# Altium PCB Encoder.PcbDoc
Units mil, origin at the board's own origin, x right, y up, seen from the top; angles counter-clockwise.
Board outline 1125.98 x 1665.21 mil, 2 copper layers (Top Layer, Bottom Layer); 8 components, 10 nets, 36 pads, 0 vias.
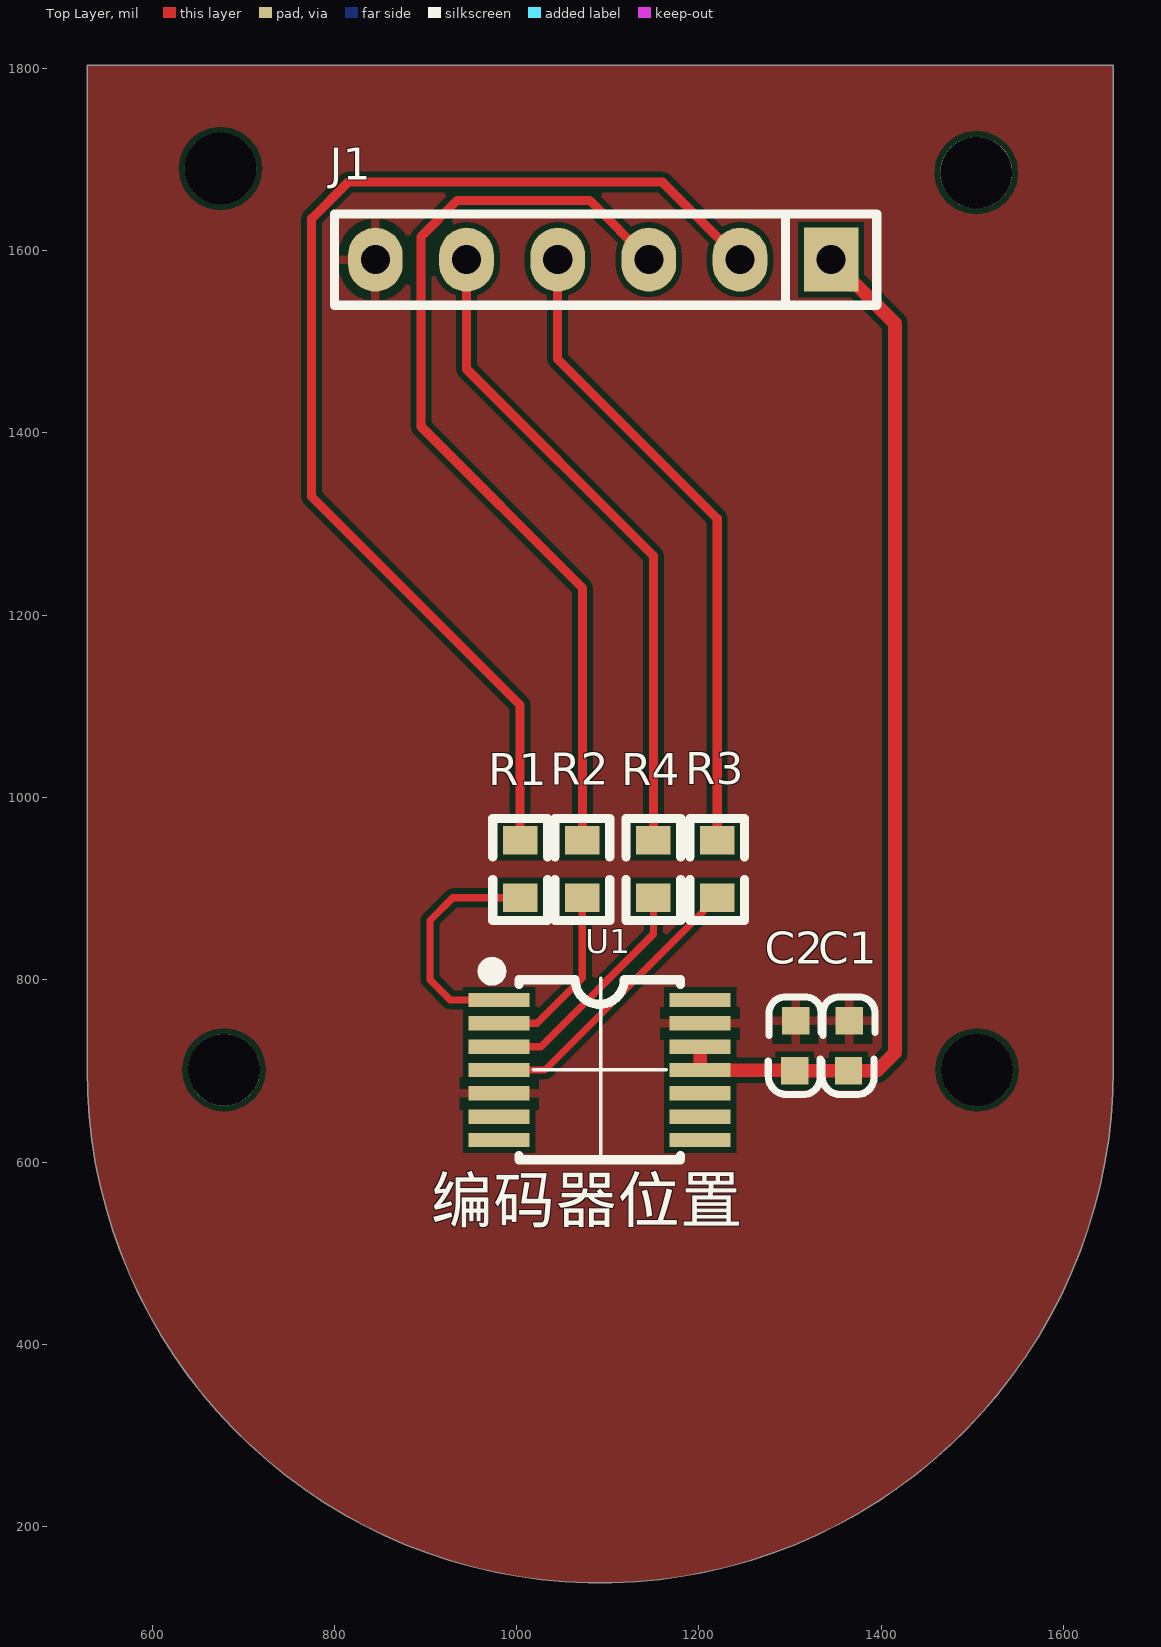
[diagram p0: Top Layer view]
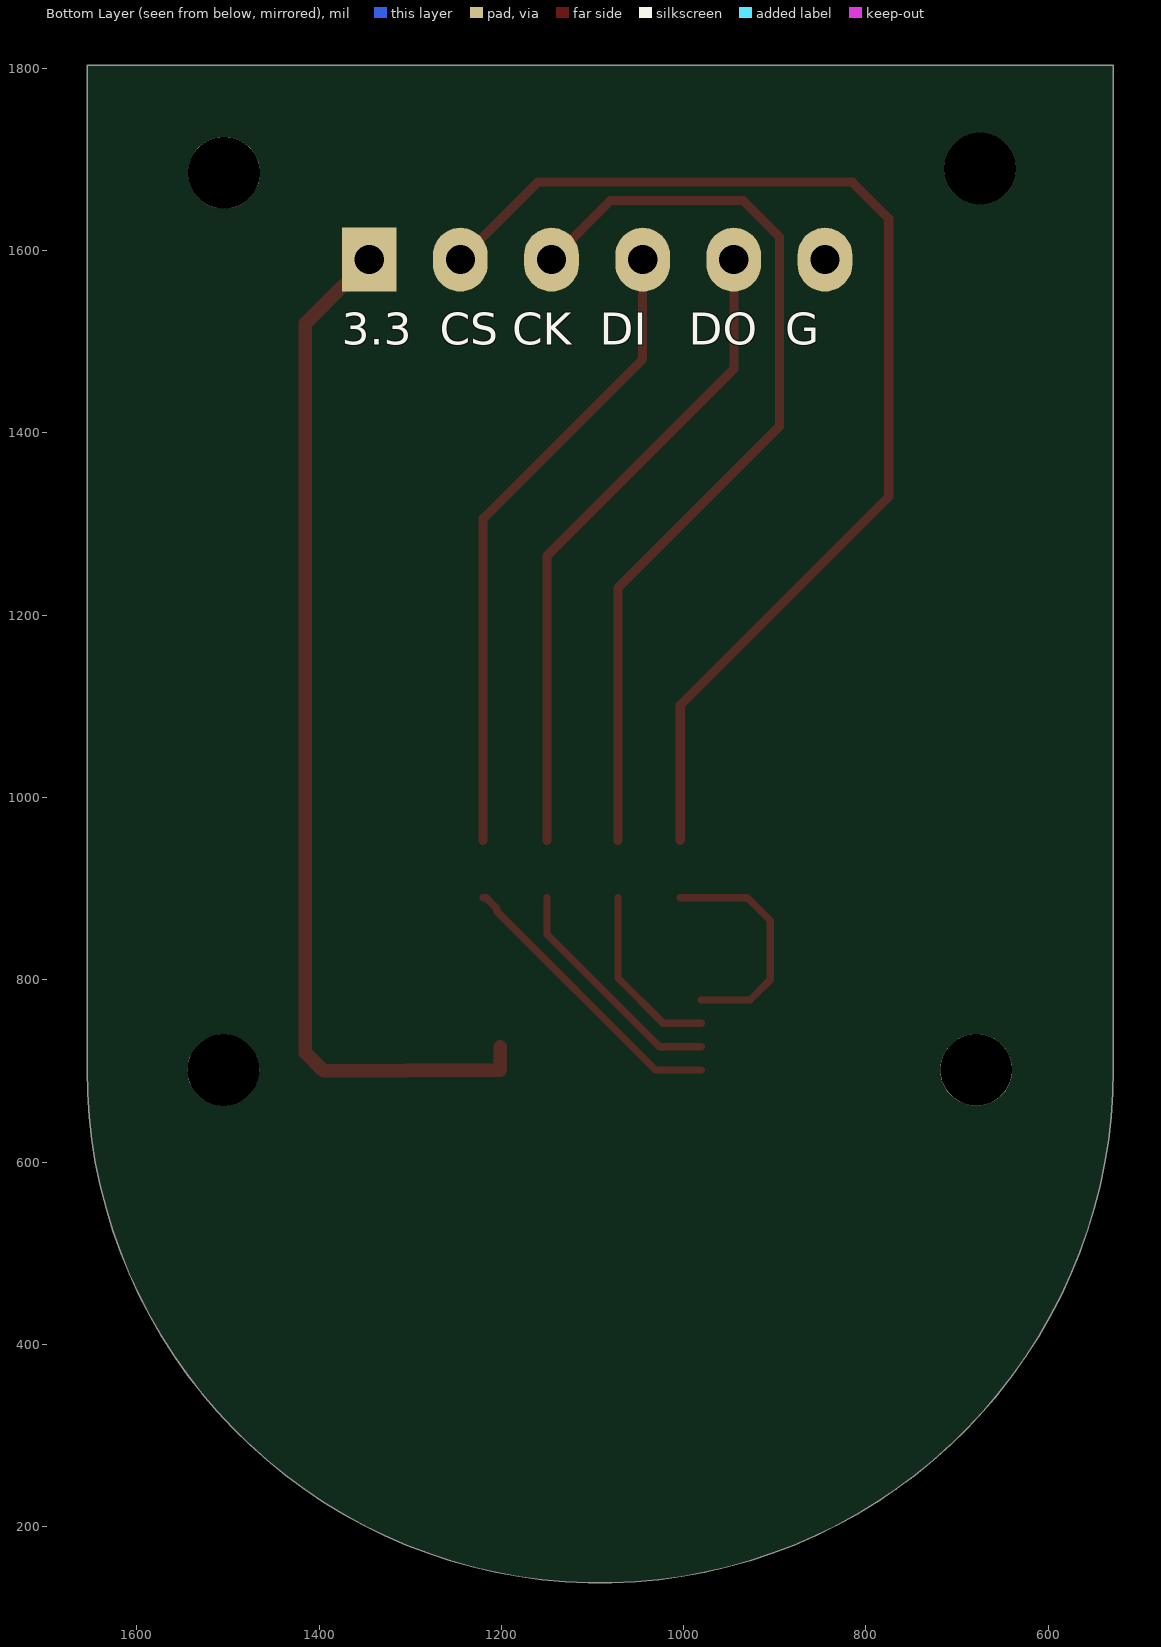
[diagram p1: Bottom Layer view, seen from below]
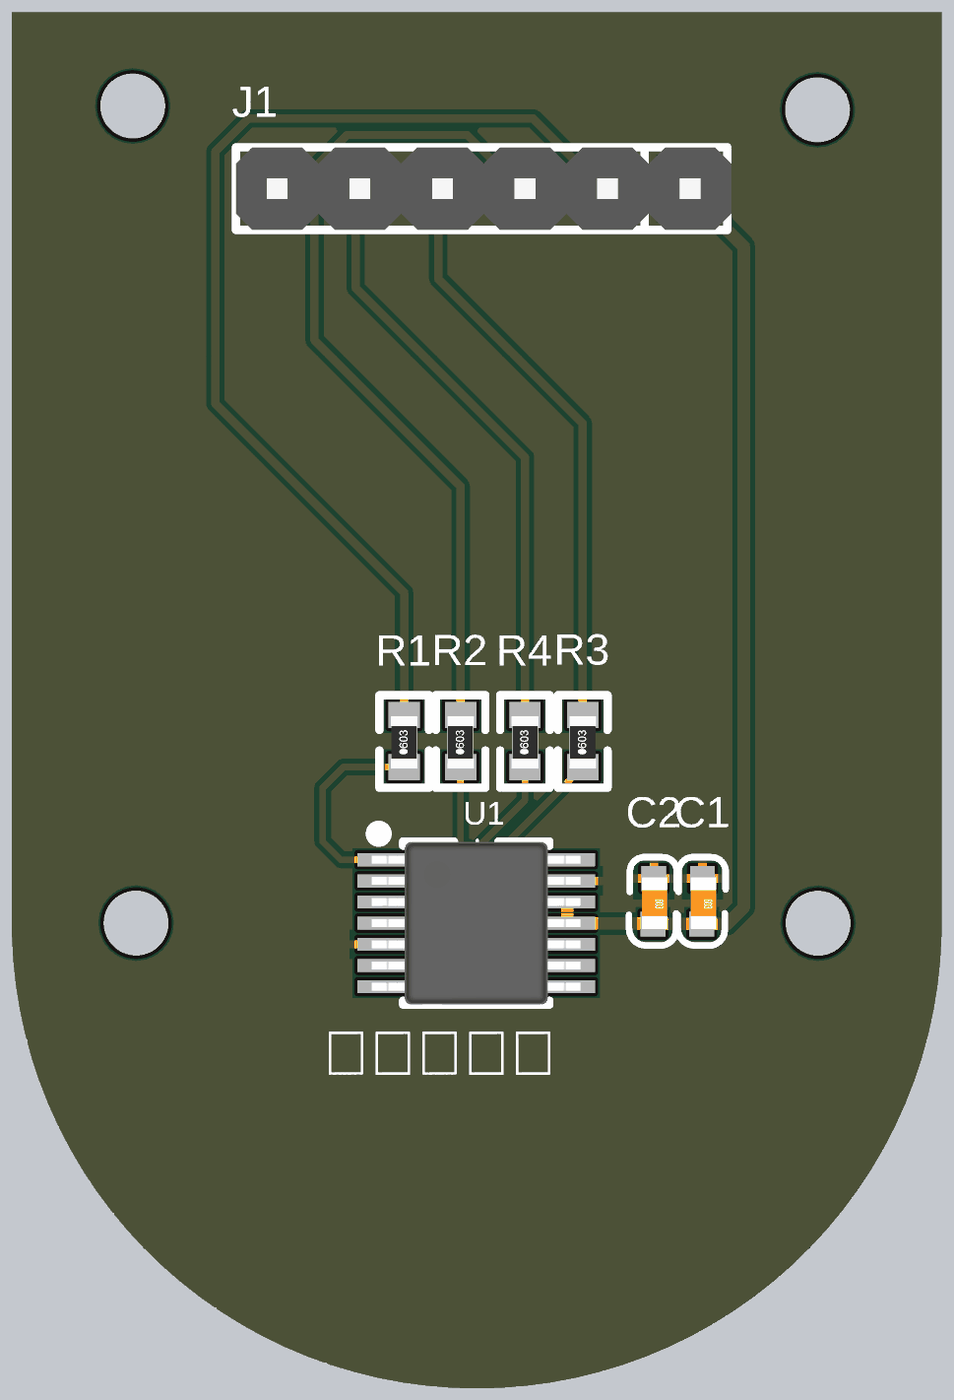
[diagram p2: 3D render of the assembled board from above, using the file's embedded part models]

## Layer stack, top to bottom
Top Solder: solder mask 0.4, Solder Resist, Dk 3.5
Top Layer: signal copper 1.4
Dielectric 1: dielectric 12.6, FR-4, Dk 4.8
Bottom Layer: signal copper 1.4
Bottom Solder: solder mask 0.4, Solder Resist, Dk 3.5

## Board outline
528.62,701.18 528.62,1803.54 1654.61,1803.54 1654.61,701.18 cw(c1091.61,701.18)

## Design rules (kind name [scope] priority, off if disabled: settings)
Clearance [All] p1: gap=6 ignorepadtopadclearanceinfootprint=FALSE
HoleToHoleClearance [All] p1: gap=6 allowstackedmicrovias=TRUE
MinimumSolderMaskSliver [All] p1: minsoldermaskwidth=4
PolygonConnect [All] p1: thpad.connectstyle=Relief thpad.reliefconductorwidth=10 thpad.reliefentries=4 thpad.polygonreliefangle="90 Angle" thpad.airgapwidth=10 smdpad.connectstyle=Relief smdpad.reliefconductorwidth=10 smdpad.reliefentries=4 smdpad.polygonreliefangle="90 Angle" smdpad.airgapwidth=10 via.connectstyle=Direct via.reliefconductorwidth=10 via.reliefentries=4 via.polygonreliefangle="90 Angle" via.airgapwidth=10
RoutingVias [All] p1: holewidth=13.78 width=15.75 viastyle="Through Hole" minholewidth=11.81 minwidth=13.78 maxholewidth=787.4 maxwidth=984.25
SilkToSilkClearance [All] p1: silktosilkclearance=-100
SilkToSolderMaskClearance [IsPad] p1: minsilkscreentomaskgap=-100 clearancetoexposedcopper=TRUE
SolderMaskExpansion [All] p1: expansion=4 istentingtop=FALSE
UnRoutedNet [All] p1: checkbadconnections=TRUE
Width [All] p1: maxlimit=550 minlimit=7 preferedwidth=10
25 further rules are at their usual default settings.

## Components (designator, comment, footprint, x,y, rotation, side; value= is the part's Value field where it differs from the comment)
C1 "Capacitor" 0603C 1365.35,755.21 r270 top value=100nF
C2 "Capacitor" 0603C 1306.35,755.21 r270 top value=1uF
J1 "Header 6" "Pin HDR1X6/2.54mm-S" 1345,1590 r270 top
R1 "Res2" 0603R 1003.75,890 r90 top value=100R
R2 "Res2" 0603R 1072.09,890 r90 top value=100R
R3 "Res2" 0603R 1220,890 r90 top value=100R
R4 "Res2" 0603R 1150,890 r90 top value=100R
U1 "AS5047P" TSSOP-14 1091,701 r270 top locked

## Footprints (in the part's own frame and the unit in brackets; to place one, negate y for a bottom-side part, rotate by r counter-clockwise, add the part's x,y. Pads: shape width x height; smd on the part's side, far side on the other; paste and mask are expansions set on the pad)
0603C [mil]
  rect 30x30 smd: 1(0.21,-0.35) 2(55.21,-1.35)
  silkscreen extent -26,-30 81,28, body extent -1,-15 62,17, height 12
0603R [mm]
  rect 0.8x0.965 smd: 1(0,0) 2(1.6,0)
  silkscreen extent -0.64,-0.76 2.21,0.76, body extent -0.04,-0.41 1.56,0.41, height 0.45
"Pin HDR1X6/2.54mm-S" [mil]
  rect 70x60 hole 32: 1(0,0)
  oval 70x60 hole 32: 2(0,-100) 3(0,-200) 4(0,-300) 5(0,-400) 6(0,-500)
  silkscreen extent -50,-545 50,50, body extent -50,-545 50,55, height 336
TSSOP-14 [mm]
  rect 0.4x1.7 smd: 1(-1.95,-2.8) 2(-1.3,-2.8) 3(-0.65,-2.8) 4(0,-2.8) 5(0.65,-2.8) 6(1.3,-2.8) 7(1.95,-2.8) 8(1.95,2.8) 9(1.3,2.8) 10(0.65,2.8) 11(0,2.8) 12(-0.65,2.8) 13(-1.3,2.8) 14(-1.95,2.8)
  silkscreen extent -2.95,-3.2 2.5,2.25, body extent -2.5,-3.21 2.5,3.21, height 1.01

## Part data
C1 C2: library part Cap, LatestRevisionDate=17-Jul-2002, LatestRevisionNote="Re-released for DXP Platform.", PackageDescription="Radial Cap, Thru-Hole; 2 Leads; 0.3 in Pin Spacing", PackageReference=RAD-0.3, Published=8-Jun-2000, Publisher="Altium Limited"
R1 R2 R3 R4: "Resistor", LatestRevisionDate=17-Jul-2002, LatestRevisionNote="Re-released for DXP Platform.", PackageDescription="Axial Device, Thru-Hole; 2 Leads; 0.4 in Pin Spacing", PackageReference=AXIAL-0.4, Published=8-Jun-2000, Publisher="Altium Limited"

## Free pads (board coordinates)
  round 78.74 hole 78.74 unplated: 1(675,1690) 2(1504.22,1685.43) 3(679.03,701.18) 4(1505,701)

## Nets (pads, with @x,y where several pads share a name; then routed paths per layer and width w, separated by ;. In a path a pad name is that pad's centre, name@x,y a point inside that pad or via, vN(x,y) a via of type N, cw(c..) or ccw(c..) an arc to the next point about the centre after c; other vN are vias at no path point)
CLK: R2.1 U1.2 | length 200
  Top Layer w8: U1.2 1022.38,752.18 1072.09,801.89 R2.1
CS: R1.1 U1.1 | length 259.1
  Top Layer w8: U1.1 927.23,777.77 905,800 905,865 930,890 R1.1
GND: C1.1 C2.1 J1.6 U1.5 U1.13
MISO: R4.1 U1.3 | length 260.4
  Top Layer w8: U1.3 1026.59,726.59 1150,850 R4.1
MOSI: R3.1 U1.4 | length 319.4
  Top Layer w8: U1.4 1031,701 1205,875 1205,878.25 1216.75,890 R3.1
NetJ1_2: J1.2 R1.2 | length 1298.5
  Top Layer w10: R1.2 1003.75,1101.25 775,1330 775,1635 815,1675 1160,1675 J1.2
NetJ1_3: J1.3 R2.2 | length 1028.9
  Top Layer w10: R2.2 1072.09,1229.83 895,1406.91 895,1615 935,1655 1080,1655 J1.3
NetJ1_4: J1.4 R3.2 | length 709.5
  Top Layer w10: J1.4 1045,1480.95 1220,1305.95 R3.2
NetJ1_5: J1.5 R4.2 | length 721.9
  Top Layer w10: J1.5 945,1470 1150,1265 R4.2
VCC: C1.2 C2.2 J1.1 U1.11 U1.12 | length 1150
  Top Layer w15: U1.12 U1.11 1201.61,700.63 1304.37,700.63 C2.2 C1.2 1395,700 1415,720 1415,1520 1372.5,1562.5 1367.5,1562.5 1345,1585 J1.1
pads on no net: U1.6 U1.7 U1.8 U1.9 U1.10 U1.14

## Polygon pours and split planes (outlines as drawn)
GND on Top Layer "Top_GND" (solid, pour order 0): 528.62,701.18 528.62,1803.54 1654.61,1803.54 1654.61,701.18 cw(c1091.61,701.18)

## Silkscreen, mask and mechanical layers (free items; w line width, h text height)
Top Overlay:
  lines w3.94: 1018.16,701.18 1163.83,701.18 ; 1092.08,600.61 1092.08,801.39
  text "编码器位置" at 905,517.79 h85.71
Bottom Overlay:
  text "3.3  CS CK  DI   DO  G" at 1375,1485 h60
Mechanical 1:
  the board outline again, w3.94